# Altium PCB 4.2inchbarcode1.PcbDoc
Units mm, origin at the board's own origin, x right, y up, seen from the top; angles counter-clockwise.
Board outline 113.92 x 82.94 mm, 2 copper layers (Top Layer, Bottom Layer), stack 1.57 mm thick; 91 components, 63 nets, 333 pads, 120 vias.
Unrouted connection lines stored in the file: 50.
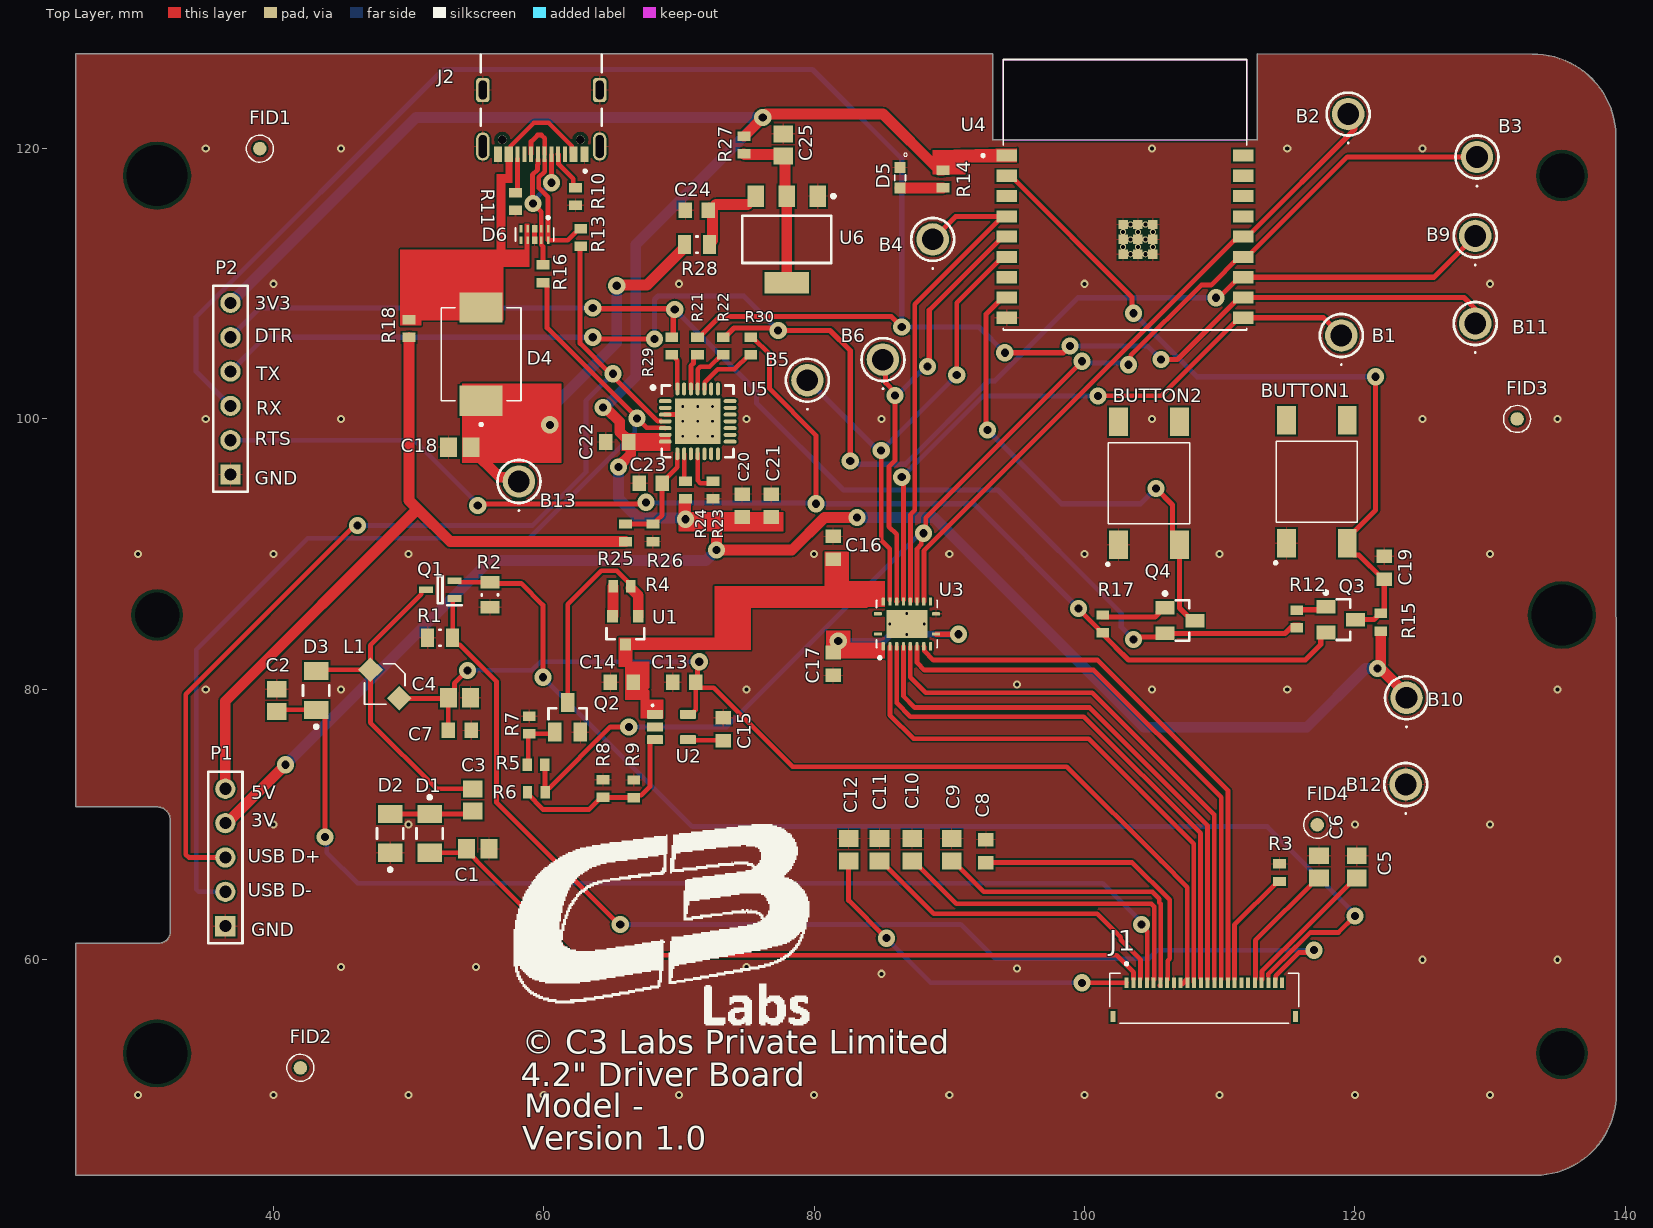
[diagram p0: Top Layer view]
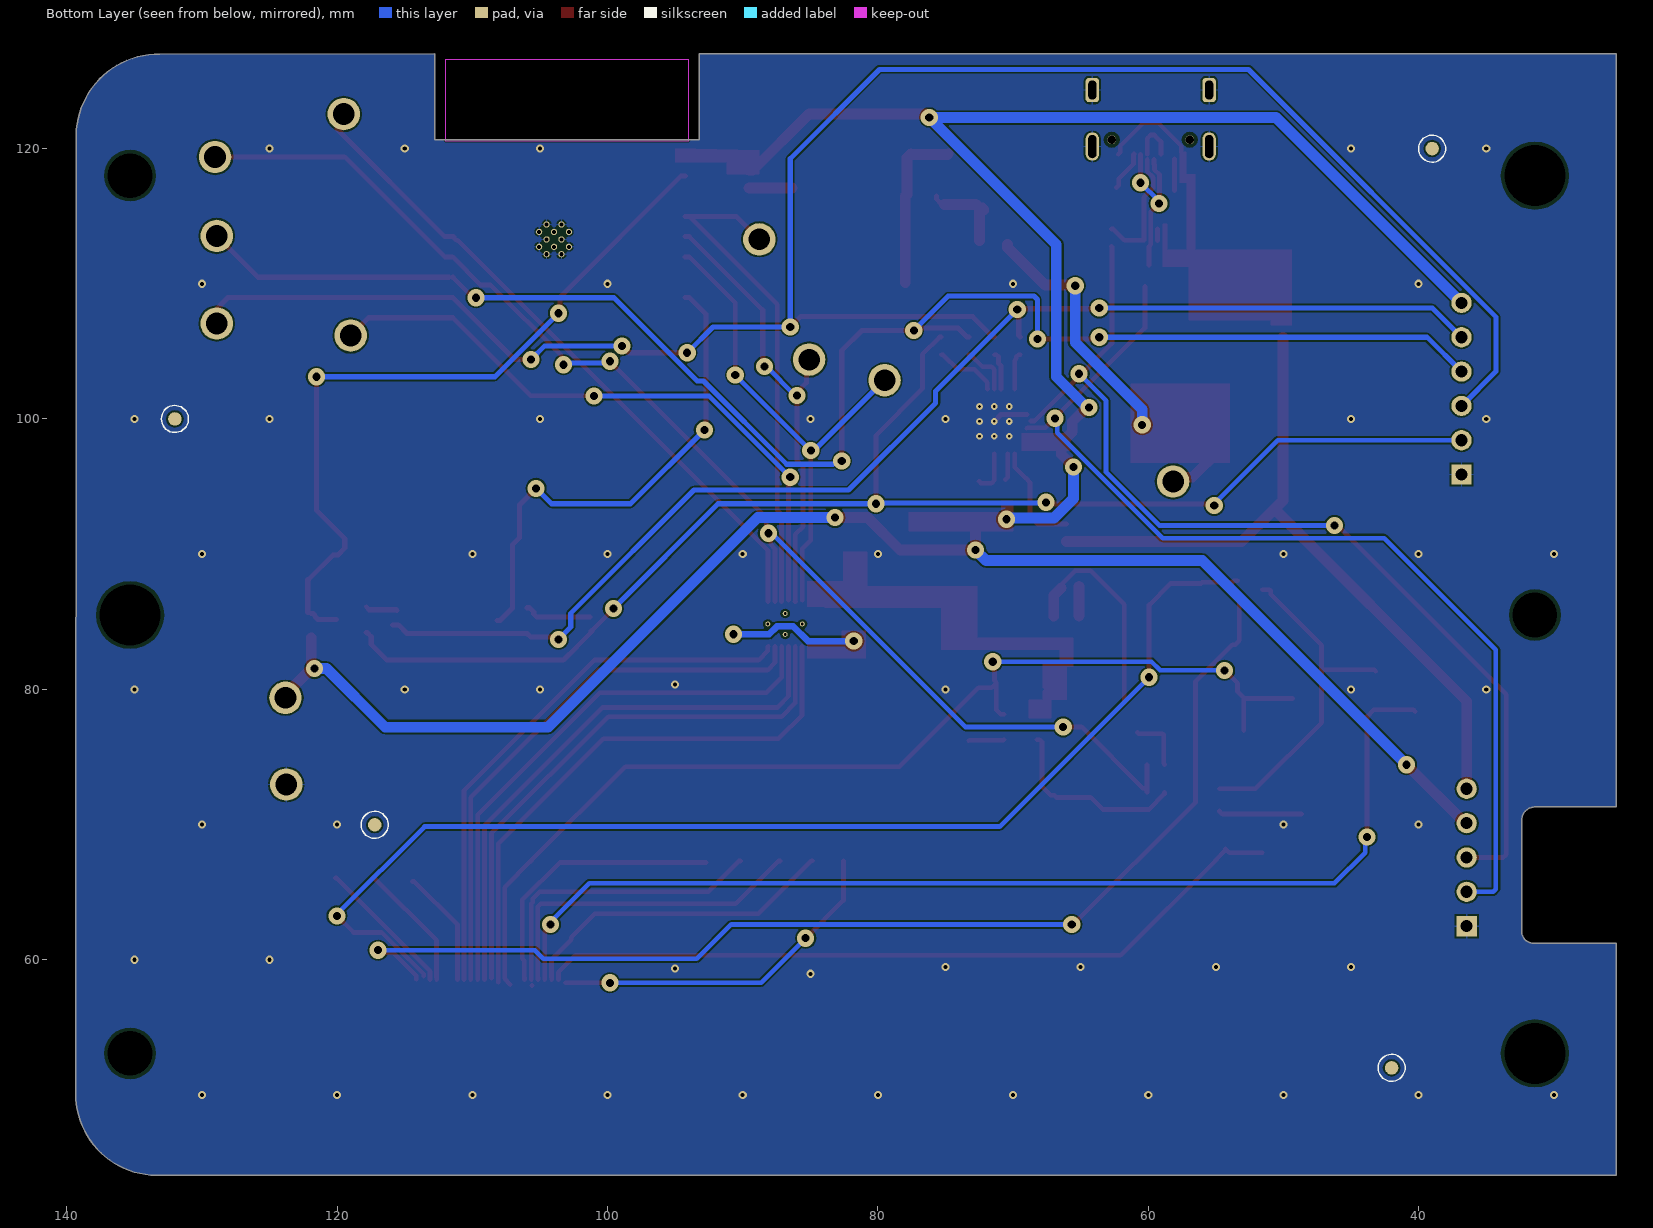
[diagram p1: Bottom Layer view, seen from below]
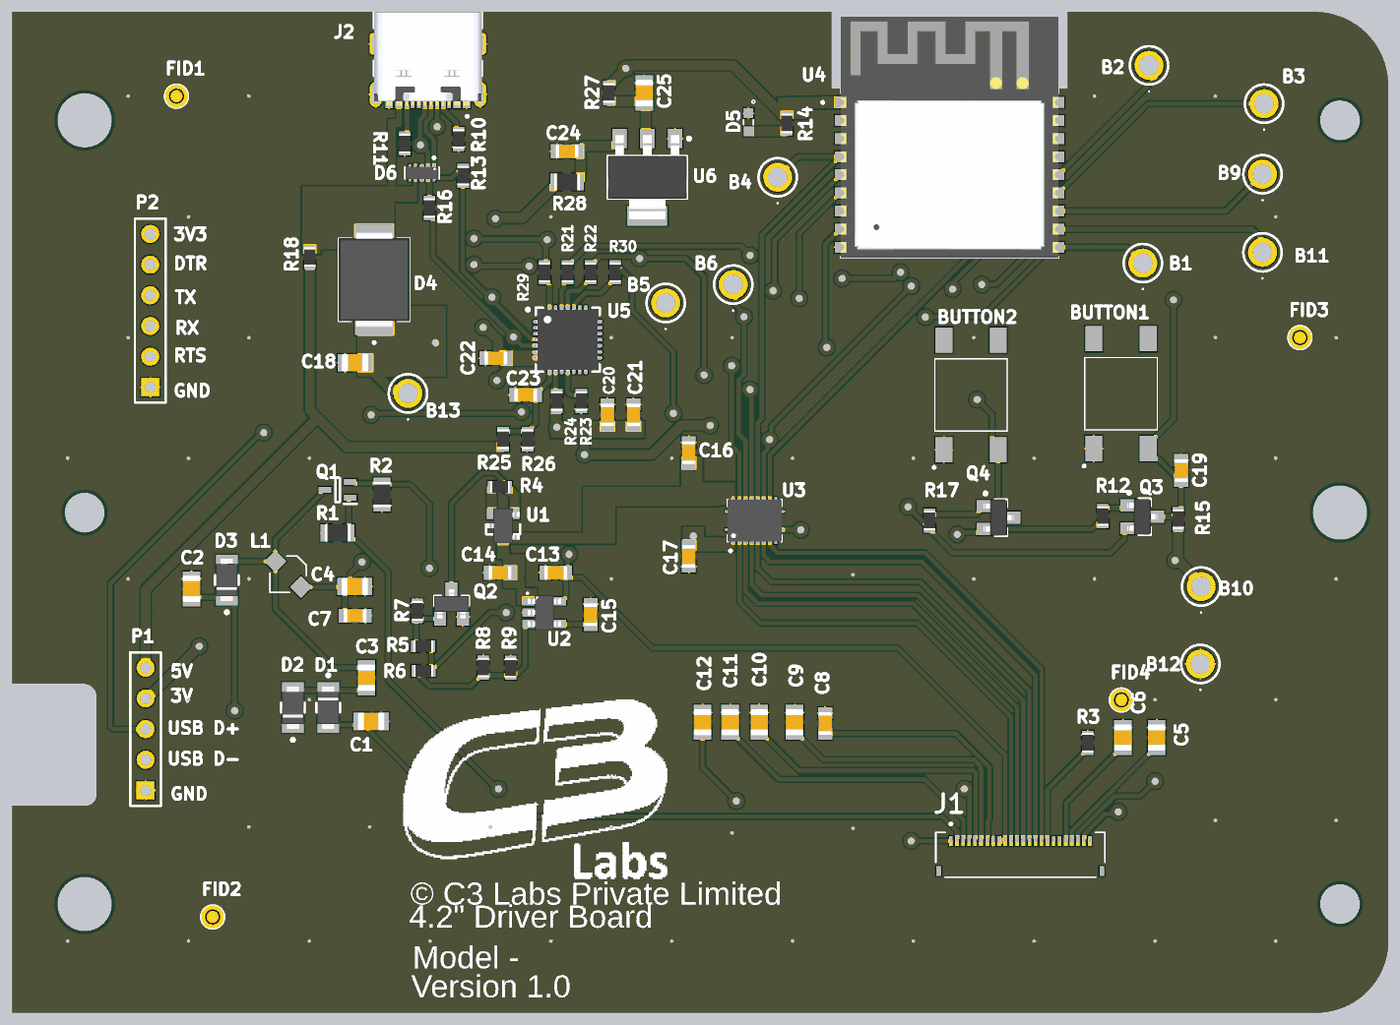
[diagram p2: 3D render of the assembled board from above, using the file's embedded part models]

## Layer stack, top to bottom
Top Solder: solder mask 0.0127, Solder Resist, Dk 3.8
Top Layer: signal copper 0.035
Dielectric: core 1.5, FR-4, Dk 4.5
Bottom Layer: signal copper 0.035
Bottom Solder: solder mask 0.0127, Solder Resist, Dk 3.8

## Board outline
25.4,44.069 25.4,61.087 25.4,61.214 31.496,61.214 ccw(c31.496,62.103) 32.385,62.103 32.385,70.294 ccw(c31.369,70.294) 31.369,71.31 25.4,71.31 25.4,127 93.218,127 93.218,120.65 112.776,120.65 112.776,127 133.118,126.981 cw(c133.218,120.898) 139.302,120.998 139.302,120.997 139.319,49.706 cw(c133.33,50.058) 132.977,44.069

## Design rules (kind name [scope] priority, off if disabled: settings)
BoardOutlineClearance [InNet('No Net') And OnLayer('Top Layer')] p1: gap=0.2 ignorepadtopadclearanceinfootprint=FALSE
Clearance [All] p1: gap=0.127 ignorepadtopadclearanceinfootprint=TRUE except(0.25: Arc-Hole Track-Hole SMDPad-Hole THPad-Hole Via-Hole Fill-Hole Poly-Hole Region-Hole Text-Hole)
ComponentClearance [All] p1: gap=0.127 collisioncheckmode=3 verticalgap=0.127 showdistances=TRUE
DiffPairsRouting [All] p1: maxlimit=0.254 minlimit=0.127 mostfreqgap=0.127 toplayer_minwidth=0.127 toplayer_maxwidth=25.4 toplayer_prefwidth=0.127 bottomlayer_minwidth=0.127 bottomlayer_maxwidth=25.4 bottomlayer_prefwidth=0.127 maxuncoupledlength=12.7
Height [All] p1: minheight=0 maxheight=1816.048 prefheight=12.7
HoleSize [IsVia] p1: absolutevalues=TRUE maxlimit=6.3 minlimit=0.2 maxpercent=80.000 minpercent=20.000
HoleToHoleClearance [All] p1: gap=0.25 allowstackedmicrovias=FALSE
MinimumAnnularRing [All] p1: minimumring=0.076
MinimumSolderMaskSliver [All] p1: minsoldermaskwidth=0
PlaneClearance [All] p1: clearance=0.127
PlaneConnect PlaneConnectPowerPads [InPadClass('PowerPads')] p1: planeconnectstyle=Direct reliefexpansion=0.508 reliefentries=4 reliefconductorwidth=0.254 reliefairgap=0.254
PlaneConnect [All] p2: pad.planeconnectstyle=Relief pad.reliefexpansion=0.3 pad.reliefentries=4 pad.reliefconductorwidth=0.127 pad.reliefairgap=0.127 via.planeconnectstyle=Direct via.reliefexpansion=0.3 via.reliefentries=4 via.reliefconductorwidth=0.127 via.reliefairgap=0.127
PolygonConnect PolygonConnectPowerPads [All vs (InPadClass('PowerPads'))] p1: connectstyle=Direct reliefconductorwidth=0.254 reliefentries=4 polygonreliefangle="90 Angle" airgapwidth=0.254
PolygonConnect [All] p2: thpad.connectstyle=Relief thpad.reliefconductorwidth=0.127 thpad.reliefentries=4 thpad.polygonreliefangle="90 Angle" thpad.airgapwidth=0.127 smdpad.connectstyle=Relief smdpad.reliefconductorwidth=0.127 smdpad.reliefentries=4 smdpad.polygonreliefangle="90 Angle" smdpad.airgapwidth=0.127 via.connectstyle=Direct via.reliefconductorwidth=0.127 via.reliefentries=4 via.polygonreliefangle="90 Angle" via.airgapwidth=0.127
RoutingVias [All] p1: holewidth=0.3 width=0.6 viastyle="Through Hole" minholewidth=0.3 minwidth=0.6 maxholewidth=0.6 maxwidth=6.6
SilkToSilkClearance [All] p1: silktosilkclearance=0
SilkToSolderMaskClearance [IsText] p1: minsilkscreentomaskgap=0.127 clearancetoexposedcopper=TRUE
SolderMaskExpansion [All] p1: expansion=0.075 istentingtop=FALSE
Width [All] p1: maxlimit=25.4 minlimit=0.127 preferedwidth=0.127 minimp=50.000000 maximp=50.000000 favimp=50.000000
20 further rules are at their usual default settings.

## Classes and differential pairs
component class microcontroller_board2: B9 B10 B11 B12 B13 BUTTON1 BUTTON2 C18 C19 C20 C21 C22 C23 C24 C25 D4 D5 D6 J2 P1 P2 Q3 Q4 R10 R11 R12 R13 R14 R15 R16 R17 R18 R21 R22 R23 R24 R25 R26 R27 R28 R29 R30 U4 U5 U6
component class 4.2inchdisplay1: B1 B2 B3 B4 B5 B6 C1 C2 C3 C4 C5 C6 C7 C8 C9 C10 C11 C12 C13 C14 C15 C16 C17 D1 D2 D3 L1 Q1 Q2 R1 R2 R3 R4 R5 R6 R7 R8 R9 U1 U2 U3

## Components (designator, comment, footprint, x,y, rotation, side; value= is the part's Value field where it differs from the comment)
B1 "5010" 5010 118.999,106.172 r0 top
B2 "5010" 5010 119.507,122.555 r0 top
B3 "5010" 5010 129.032,119.38 r0 top
B4 "5010" 5010 88.773,113.284 r0 top
B5 "5010" 5010 79.502,102.87 r0 top
B6 "5010" 5010 85.09,104.394 r0 top
B9 "5010" 5010 128.905,113.538 r0 top
B10 "5010" 5010 123.825,79.375 r0 top
B11 "5010" 5010 128.905,107.061 r0 top
B12 "5010" 5010 123.761,72.962 r0 top
B13 "5010" 5010 58.166,95.377 r0 top
BUTTON1 "TL3301AF160QG" TL3301AF160QG 117.185,95.355 r0 top
BUTTON2 "TL3301AF160QG" TL3301AF160QG 104.775,95.25 r0 top
C1 "4.7uF/25V" Cap_0805 55.118,68.199 r0 top
C2 "4.7uF/25V" Cap_0805 40.244,79.184 r90 top
C3 "4.7uF/25V" Cap_0805 54.737,71.819 r270 top
C4 "4.7uF/25V" Cap_0805 53.769,79.375 r0 top
C5 "4.7uF/25V" Cap_0805 120.142,66.865 r270 top
C6 "4.7uF/25V" Cap_0805 117.348,66.865 r270 top
C7 "100nF/50v" Cap_0603 53.794,76.962 r180 top
C8 "1uF/50v" Cap_0603 92.71,68.034 r270 top
C9 "4.7uF/25V" Cap_0805 90.17,68.136 r270 top
C10 "4.7uF/25V" Cap_0805 87.249,68.136 r270 top
C11 "4.7uF/25V" Cap_0805 84.836,68.137 r270 top
C12 "1uF/25V" Cap_0805 82.55,68.136 r270 top
C13 "1uF" Cap_0603 70.397,80.518 r180 top
C14 "1uF" Cap_0603 65.786,80.518 r180 top
C15 "22nF" Cap_0603 73.279,77.05 r90 top
C16 "0.1uF" Cap_0603 81.407,90.463 r90 top
C17 "0.1uF" Cap_0603 81.407,81.876 r90 top
C18 "22uF" Cap_0805 53.784,97.917 r0 top
C19 "1uF/16V" Cap_0603 122.174,88.988 r90 top
C20 "10uF/25V" Cap_0603 74.676,93.599 r90 top
C21 "0.1uF/50V" Cap_0603 76.835,93.599 r90 top
C22 "10uF/25V" Cap_0603 65.444,98.298 r180 top
C23 "1uF/16V" Cap_0603 67.906,95.25 r180 top
C24 "10uF/16V" Cap_0603 71.335,115.443 r0 top
C25 "100uF/6.3V" Cap_0805 77.724,120.269 r270 top
D1 "" ON_Semi_SOD-123F_0 51.562,69.342 r270 top
D2 "" ON_Semi_SOD-123F_0 48.641,69.342 r90 top
D3 "" ON_Semi_SOD-123F_0 43.165,79.916 r90 top
D4 "SS34" DIOM7959X265N 55.372,104.79 r90 top
D5 "LTST-C190KRKT" LEDM1608X80 86.36,117.844 r270 top
D6 "TPD4E02B04DQAR" DIO_TPD4E02B04DQAR 59.325,113.644 r270 top
FID1 "Comment" FIDUCIAL1SM2 39,120 r0 top
FID2 "Comment" FIDUCIAL1SM2 42,52 r0 top
FID3 "Comment" FIDUCIAL1SM2 132,100 r0 top
FID4 "Comment" FIDUCIAL1SM2 117.221,69.977 r0 top
J1 "AYF532435" PANASONIC_AYF532435 108.86,57.15 r0 top
J2 "USB4105-GF-A" GCT_USB4105-GF-A 59.817,124.333 r180 top
L1 "CDRH2D18/LDNP-470NC" IND_CDRH2D18/HPNP-1R1NC 48.245,80.391 r0 top
P1 "Header 5" HDR1X5 36.449,62.484 r90 top
P2 "Header 6" HDR1X6 36.83,95.885 r90 top
Q1 "SI1308EDL-T1-GE3" SOT65P210X110-3N 52.339,87.376 r180 top
Q2 "MMS8050-H-TP" SOT23-BEC 61.768,77.935 r0 top
Q3 "KSC3265YMTF" KSC3265YMTF 118.956,85.156 r0 top
Q4 "KSC3265YMTF" KSC3265YMTF 107.061,85.09 r0 top
R1 "10k/NC" RES_0805 52.339,83.82 r180 top
R2 "2.2ohm" RES_0805 56.022,86.995 r270 top
R3 "0" RES_0603 114.427,66.436 r270 top
R4 "100k" RES_0603 65.786,87.63 r180 top
R5 "1k" RES_0603 59.436,74.422 r180 top
R6 "1k" RES_0603 59.451,72.39 r0 top
R7 "47k" RES_0603 58.928,77.358 r270 top
R8 "47k" RES_0603 64.389,72.659 r90 top
R9 "100K" RES_0603 66.66,72.644 r270 top
R10 "4.7K" RES_0603 62.357,116.459 r90 top
R11 "4.7K" RES_0603 57.912,116.078 r90 top
R12 "10k" RES_0603 115.697,85.217 r90 top
R13 "0" RES_0603 62.738,113.411 r90 top
R14 "50" RES_0603 89.535,117.744 r90 top
R15 "10k" RES_0603 121.92,84.963 r270 top
R16 "0" RES_0603 59.944,110.744 r90 top
R17 "10k" RES_0603 101.346,84.851 r90 top
R18 "0" RES_0603 50.038,106.68 r90 top
R21 "0" RES_0603 71.374,105.41 r90 top
R22 "0" RES_0603 73.279,105.41 r90 top
R23 "10k" RES_0603 72.517,94.742 r270 top
R24 "1k" RES_0603 70.485,94.742 r270 top
R25 "22K" RES_0603 66.04,91.582 r270 top
R26 "47.5K" RES_0603 68.072,91.582 r270 top
R27 "0" RES_0603 74.803,120.269 r90 top
R28 "0R" RES_0805 71.338,112.903 r0 top
R29 "0" RES_0603 69.469,105.41 r90 top
R30 "0" RES_0603 75.311,105.41 r90 top
U1 "SI2301CDS-T1-E3" SOT23-3 66.04,84.412 r180 top
U2 "RT9193-33GB" SOT94P279X129-5N 69.454,77.216 r0 top
U3 "TXS0108ERGYR" IC_TXS0108ERGYR 86.863,84.836 r90 top
U4 "ESP32-C3-WROOM-02-N4" MODULE_ESP32-C3-WROOM-02-H4 102.997,116.586 r0 top
U5 "CP2102N-A02-GQFN28" CP2102N-A02-GQFN28 71.387,99.822 r0 top
U6 "ZLDO1117QG33TA" ZLDO1117QG33TA 77.978,113.284 r270 top

## Footprints (in the part's own frame and the unit in brackets; to place one, negate y for a bottom-side part, rotate by r counter-clockwise, add the part's x,y. Pads: shape width x height; smd on the part's side, far side on the other; paste and mask are expansions set on the pad)
5010 [mm]
  round 2.4 hole 1.6: 1(0,0)
  silkscreen extent -1.59,-2.2 1.59,1.59
Cap_0603 [mm] "Chip Capacitor, 2-Leads, Body 1.80x1.00mm, IPC Medium Density"
  rect 1x1.15 smd: 1(-0.85,0) 2(0.85,0)
  body extent -0.95,-0.55 0.95,0.55, height 0.8
Cap_0805 [mm] "Chip Capacitor, 2-Leads, Body 2.00x1.25mm, IPC Medium Density"
  rect 1.25x1.45 smd: 1(-0.825,0) 2(0.825,0)
  body extent -1.1,-0.72 1.1,0.72, height 1.45
CP2102N-A02-GQFN28 [mm] "QFN, 28-Leads, Body 5.00x5.00mm, Pitch 0.50mm, Thermal Pad 3.35x3.35mm, IPC Medium Density"
  oval 0.95x0.3 smd: 1(-2.4,1.5) 2(-2.4,1) 3(-2.4,0.5) 4(-2.4,0) 5(-2.4,-0.5) 6(-2.4,-1) 7(-2.4,-1.5) 15(2.4,-1.5) 16(2.4,-1) 17(2.4,-0.5) 18(2.4,0) 19(2.4,0.5) 20(2.4,1) 21(2.4,1.5)
  oval 0.3x0.95 smd: 8(-1.5,-2.4) 9(-1,-2.4) 10(-0.5,-2.4) 11(0,-2.4) 12(0.5,-2.4) 13(1,-2.4) 14(1.5,-2.4) 22(1.5,2.4) 23(1,2.4) 24(0.5,2.4) 25(0,2.4) 26(-0.5,2.4) 27(-1,2.4) 28(-1.5,2.4)
  rect 3.35x3.35 smd: 29(0,0)
  silkscreen extent -3.42,-2.65 2.65,2.65, body extent -2.55,-2.55 2.55,2.55, height 0.8
DIO_TPD4E02B04DQAR [mm]
  rect 0.565x0.2 smd mask+0: 1(-0.417,1) 2(-0.417,0.5) 4(-0.417,-0.5) 5(-0.417,-1) 6(0.417,-1) 7(0.417,-0.5) 9(0.417,0.5) 10(0.417,1)
  rect 0.565x0.4 smd paste-1 mask+0: 3(-0.417,0) 8(0.417,0)
  silkscreen extent -1.35,-1.42 0.5,1.42, body extent -0.5,-1.25 0.5,1.25, height 0.55
DIOM7959X265N [mm]
  rect 2.25x3.18 smd: A(3.455,0) C(-3.455,0)
  silkscreen extent -5.3,-2.95 3.44,2.95, body extent -3.98,-2.95 3.98,2.95, height 2.65
FIDUCIAL1SM2 [mm] "FIDUCIAL 1mm Pad, 2mm SolderMask"
  round 1 smd paste-1.016 mask+0.5: ""(0,0)
  round 1 smd far side mask+0.5: ""(0,0)
  silkscreen extent -1,-1 1,1
GCT_USB4105-GF-A [mm]
  rect 0.6x1.15 smd: A1_B12(-3.2,4.755) A4_B9(-2.4,4.755) B1_A12(3.2,4.755) B4_A9(2.4,4.755)
  rect 0.3x1.15 smd: A5(-1.25,4.755) A6(-0.25,4.755) A7(0.25,4.755) A8(1.25,4.755) B5(1.75,4.755) B6(0.75,4.755) B7(-0.75,4.755) B8(-1.75,4.755)
  oval 1x2.1 hole 0.6 slot 1.7 at 90 deg: SH1(-4.32,4.18) SH2(4.32,4.18)
  rrect50% 1x1.8 hole 0.6 slot 1.4 at 90 deg: SH3(-4.32,0) SH4(4.32,0)
  round 0.65 hole 0.65 unplated: ""(-2.89,3.68) ""(2.89,3.68)
  silkscreen extent -4.47,-2.6 4.47,6.1, body extent -4.47,-2.6 4.47,5.11, height 3.31
HDR1X5 [mm] "Connector; Header; 5 Position"
  rect 1.5x1.5 hole 0.9: 1(0,0)
  round 1.5 hole 0.9: 2(2.54,0) 3(5.08,0) 4(7.62,0) 5(10.16,0)
  silkscreen extent -1.27,-1.27 11.43,1.27
HDR1X6 [mm] "Connector; Header; 6 Position"
  rect 1.5x1.5 hole 0.9: 1(0,0)
  round 1.5 hole 0.9: 2(2.54,0) 3(5.08,0) 4(7.62,0) 5(10.16,0) 6(12.7,0)
  silkscreen extent -1.27,-1.27 13.97,1.27
IC_TXS0108ERGYR [mm]
  rrect40% 0.24x0.6 smd: 1(-0.75,2.15) 10(-0.75,-2.15) 11(0.75,-2.15) 20(0.75,2.15)
  rrect40% 0.6x0.24 smd: 2(-1.65,1.75) 3(-1.65,1.25) 4(-1.65,0.75) 5(-1.65,0.25) 6(-1.65,-0.25) 7(-1.65,-0.75) 8(-1.65,-1.25) 9(-1.65,-1.75) 12(1.65,-1.75) 13(1.65,-1.25) 14(1.65,-0.75) 15(1.65,-0.25) 16(1.65,0.25) 17(1.65,0.75) 18(1.65,1.25) 19(1.65,1.75)
  rect 2.05x3.05 smd paste-3: 21(0,0)
  round 0.36 hole 0.2 mask+0: 22(0,1.275) 23(-0.775,0) 24(0.775,0) 25(0,-1.275)
  silkscreen extent -2.6,-2.25 1.75,2.25, body extent -1.75,-2.25 1.75,2.25, height 1
IND_CDRH2D18/HPNP-1R1NC [mm]
  rect 1.3x1.3 smd rot 135: 1(-1.061,1.061) 2(1.061,-1.061)
  silkscreen extent -1.5,-1.5 1.5,1.5
KSC3265YMTF [mm] "SOT23, 3-Leads, Body 2.90x2.40mm, Pitch 0.95mm, IPC Medium Density"
  rect 1.4x1 smd: 1(-1.1,0.95) 2(-1.1,-0.95) 3(1.1,0)
  silkscreen extent -1.22,-1.5 0.7,2.12, body extent -1.25,-1.5 1.25,1.5, height 1.14
LEDM1608X80 [mm]
  rect 0.8x0.8 smd: A(0.75,0) C(-0.75,0)
  silkscreen extent -1.83,-0.4 0.2,0.53
MODULE_ESP32-C3-WROOM-02-H4 [mm]
  rect 1.5x0.9 smd: 1(-8.75,2.9) 2(-8.75,1.4) 3(-8.75,-0.1) 4(-8.75,-1.6) 5(-8.75,-3.1) 6(-8.75,-4.6) 7(-8.75,-6.1) 8(-8.75,-7.6) 9(-8.75,-9.1) 10(8.75,-9.1) 11(8.75,-7.6) 12(8.75,-6.1) 13(8.75,-4.6) 14(8.75,-3.1) 15(8.75,-1.6) 16(8.75,-0.1) 17(8.75,1.4) 18(8.75,2.9)
  rect 0.7x0.7 smd: 19(-0.14,-2.2) 20(0.96,-2.2) 21(2.06,-2.2) 22(-0.14,-3.3) 23(0.96,-3.3) 24(2.06,-3.3) 25(-0.14,-4.4) 26(0.96,-4.4) 27(2.06,-4.4)
  round 0.46 hole 0.3 mask+0: 28(0.41,-2.2) 29(1.51,-2.2) 30(-0.14,-2.75) 31(0.96,-2.75) 32(2.06,-2.75) 33(0.41,-3.3) 34(1.51,-3.3) 35(-0.14,-3.85) 36(0.96,-3.85) 37(2.06,-3.85) 38(0.41,-4.4) 39(1.51,-4.4)
  Keep-Out Layer region: 9,4 -9,4 -9,10 9,10
  Keep-Out Layer region: 9,4 -9,4 -9,10 9,10
  silkscreen extent -10.6,-10 9,10, body extent -9,-10 9,10, height 3.35
ON_Semi_SOD-123F_0 [mm] "SOD-123F"
  rect 1.34x1.8 smd paste+0 mask+0: 1(-1.43,0) 2(1.43,0)
  silkscreen extent -2.8,-0.97 0.39,0.97, body extent -2.2,-1.07 2.2,1.07, height 0.25
PANASONIC_AYF532435 [mm]
  rect 0.3x0.8 smd paste-1: 1(-5.75,1.15) 2(-5.25,1.15) 3(-4.75,1.15) 4(-4.25,1.15) 5(-3.75,1.15) 6(-3.25,1.15) 7(-2.75,1.15) 8(-2.25,1.15) 9(-1.75,1.15) 10(-1.25,1.15) 11(-0.75,1.15) 12(-0.25,1.15) 13(0.25,1.15) 14(0.75,1.15) 15(1.25,1.15) 16(1.75,1.15) 17(2.25,1.15) 18(2.75,1.15) 19(3.25,1.15) 20(3.75,1.15) 21(4.25,1.15) 22(4.75,1.15) 23(5.25,1.15) 24(5.75,1.15)
  rect 0.4x0.8 smd: S1(-6.75,-1.35) S2(6.75,-1.35)
  silkscreen extent -7,-1.85 7,2.65
RES_0603 [mm]
  rect 0.7x0.95 smd: 1(-0.65,0) 2(0.65,0)
  body extent -0.8,-0.48 0.8,0.48, height 0.45
RES_0805 [mm]
  rect 0.95x1.4 smd: 1(-0.925,0) 2(0.925,0)
  silkscreen extent -0.05,-0.6 0.05,0.6, body extent -1.05,-0.7 1.05,0.7, height 0.45
SOT23-3 [mm]
  rect 0.8x0.9 smd: 1(-0.95,-1) 2(0.95,-1) 3(0,1.1)
  silkscreen extent -1.4,-0.1 1.4,0.7, body extent -1.4,-1.45 1.4,1.45, height 1.25
SOT23-BEC [mm]
  rect 1x1.4 smd: B(-0.95,-1.1) C(0,1.1) E(0.95,-1.1)
  silkscreen extent -1.42,-0.15 1.42,0.66, body extent -1.45,-1.2 1.45,1.2, height 1.11
SOT65P210X110-3N [mm]
  rect 1.05x0.5 smd: 1(-1.05,0.65) 2(-1.05,-0.65) 3(1.05,0)
  silkscreen extent -1.58,-1 0.18,1.15
SOT94P279X129-5N [mm]
  rrect12% 1.17x0.67 smd: 1(-1.22,0.94) 2(-1.22,0) 3(-1.22,-0.94) 4(1.22,-0.94) 5(1.22,0.94)
  silkscreen extent -1.47,1.53 -1.33,1.67, body extent -1.4,-1.45 1.4,1.45, height 1.3
TL3301AF160QG [mm]
  rect 1.4x2.1 smd: 1(-2.25,-4.55) 2(-2.25,4.55) 3(2.25,-4.55) 4(2.25,4.55)
  silkscreen extent -3.1,-6.05 3,3
ZLDO1117QG33TA [mm] "SOT223, 4-Leads, Body 6.50x7.00mm (avg), Pitch 2.30mm, IPC Medium Density"
  rect 1.6x1.2 smd: 1(-3.2,2.3) 2(-3.2,0) 3(-3.2,-2.3)
  rect 1.6x3.3 smd: 4(3.2,0)
  silkscreen extent -3.32,-3.3 1.75,3.58, body extent -3.5,-3.27 3.5,3.27, height 1.66

## Part data
B1 B2 B3 B4 B5 B6 B9 B10 B11 B12 B13: "KEYSTONE - 5010 - TEST POINT, PCB, THROUGH HOLE", Manufacturer_Name="Keystone Electronics", Mouser Part Number=534-5010, Arrow Part Number=5010, Arrow Price/Stock=https://www.arrow.com/en/products/5010/keystone-electronics?region=europe, Datasheet Link=http://www.farnell.com/datasheets/1703983.pdf, Geometry.Height=8.28mm, Manufacturer_Part_Number=5010, Mouser Price/Stock=https://www.mouser.co.uk/ProductDetail/Keystone-Electronics/5010?qs=qOqV1E1P08SzD%252BWfk1wMXQ%3D%3D, MP=5010
BUTTON1 BUTTON2: library part CON4AP_0, MP=TL3301AF160QG
C1 C2 C3 C4 C5 C6: library part CAP_0805, MP=KAM15AR71H104KM, Package Size=CAP_0805
C7: library part CAP_0603, "KAM15AR71H104KM", MP=KAM15AR71H104KM, Package Size=CAP_0603
C8: library part CAP_0603, "UMK107AB7105KA-T", MP=UMK107AB7105KA-T, Package Size=CAP_0603
C9 C10 C11: library part CAP_0805, "TMK212AB7475KG-T", MP=TMK212AB7475KG-T, Package Size=CAP_0805
C12: library part CAP_0805, "MCAST21GSB7105MTNB25", MP=MCAST21GSB7105MTNB25, Package Size=CAP_0805
C13 C14: library part CAP_0603, "GRT188R61H105KE13D", MP=GRT188R61H105KE13D, Package Size=CAP_0603
C15: library part CAP_0603, "GCM188R71H223KA37J", MP=GCM188R71H223KA37J, Package Size=CAP_0603
C16: library part CAP_0603, MP=GCM188R71H104KA57J, Package Size=CAP_0603
C17: library part CAP_0603, "GCM188R71H104KA57J", MP=GCM188R71H104KA57J, Package Size=CAP_0603
C18: library part CAP_0805, "810-C2012X5R1V226MAC", MP=C2012X5R1V226M125AC, Package Size=CAP_0805
C19: library part "CAP NP_Dup2", Manufacturer=Murata, Part Name=NC_GRM155R71H104KE14D, Part Number=NC_0102-1422C12, Tolerance=¡Ó10%, Voltage=16V, 0 LOAD CHECK 0=¡´, Characteristics=X7R, Distributor=¹ñ´I, Distributor1=·ç±¶, Distributor2=¬ü©_, EIAJ=C0402, GeometryHeight=0.55mm, Material Description=NC_CAP,ML,0.1uF,X7R,50V,0402,K%,MU,RoHS, MP=GRT188R71C105KE13D, Part Type=Capacitor, PCB Footprint=C0603
C20: library part "CAP NP_Dup2", Manufacturer=Murata, Part Name=GRM188R61E106MA73J, Part Number=NC_0102-1422C12, Tolerance=¡Ó10%, Voltage=25V, 0 LOAD CHECK 0=¡´, Characteristics=X7R, Distributor=¹ñ´I, Distributor1=·ç±¶, Distributor2=¬ü©_, EIAJ=C0402, GeometryHeight=0.55mm, Material Description=NC_CAP,ML,0.1uF,X7R,50V,0402,K%,MU,RoHS, MP=GRM188R61E106MA73J, Part Type=Capacitor, PCB Footprint=C0603
C21: library part "CAP NP_Dup2", Manufacturer=Murata, Part Name=NC_GRM155R71H104KE14D, Part Number=NC_0102-1422C12, Tolerance=¡Ó10%, Voltage=50V, 0 LOAD CHECK 0=¡´, Characteristics=X7R, Distributor=¹ñ´I, Distributor1=·ç±¶, Distributor2=¬ü©_, EIAJ=C0402, GeometryHeight=0.55mm, Material Description=NC_CAP,ML,0.1uF,X7R,50V,0402,K%,MU,RoHS, MP=GCM188R71H104KA57J, Part Type=Capacitor, PCB Footprint=C0603
C22: library part "CAP NP_Dup2", "GRM188R61E106MA73J", Manufacturer=Murata, Part Name=NC_GRM155R71H104KE14D, Part Number=NC_0102-1422C12, Tolerance=¡Ó10%, Voltage=16V, 0 LOAD CHECK 0=¡´, Characteristics=X7R, Distributor=¹ñ´I, Distributor1=·ç±¶, Distributor2=¬ü©_, EIAJ=C0402, GeometryHeight=0.55mm, Material Description=NC_CAP,ML,0.1uF,X7R,50V,0402,K%,MU,RoHS, MP=GRM188R61E106MA73J, Part Type=Capacitor, PCB Footprint=C0603
C23: library part "CAP NP_Dup2", "GRT188R71C105KE13D", Manufacturer=Murata, Part Name=NC_GRM155R71H104KE14D, Part Number=NC_0102-1422C12, Tolerance=¡Ó10%, Voltage=16V, 0 LOAD CHECK 0=¡´, Characteristics=X7R, Distributor=¹ñ´I, Distributor1=·ç±¶, Distributor2=¬ü©_, EIAJ=C0402, GeometryHeight=0.55mm, Material Description=NC_CAP,ML,0.1uF,X7R,50V,0402,K%,MU,RoHS, MP=GRT188R71C105KE13D, Part Type=Capacitor, PCB Footprint=C0603
C24: library part CAP_0603, "C54", MP=GRM188R61C106MAALD, Package Size=CAP_0603
C25: library part CAP_0805, "GRM21BR60J107ME15K", MP=GRM21BR60J107ME15K, Package Size=CAP_0805
D1 D2 D3: library part "Schottky Diode", "Schottky Barrier Rectifier, 40 V Maximum DC Blocking Voltage, -65 to 125 degC, 2-Pin SMA Case, RoHS", ComponentLink1Description="Manufacturer URL", ComponentLink1URL=http://www.vishay.com/, ComponentLink2Description=Datasheet, ComponentLink2URL=http://www.vishay.com/docs/88746/ss12.pdf, ComponentLink3Description="Package Specification", ComponentLink3URL=http://www.vishay.com/docs/88746/ss12.pdf, MF=CDRH2D18/LDNP-470NC, MP=CDRH2D18/LDNP-470NC
D4: "Diode Schottky 40 V 3A Surface Mount SMC (DO-214AB)", Package="SMC-2 ON Semiconductor", Check_prices=https://www.snapeda.com/parts/SS34/Onsemi/view-part/?ref=eda, MF=onsemi, MP=SS34, SnapEDA_Link=https://www.snapeda.com/parts/SS34/Onsemi/view-part/?ref=snap
D5: library part HSMS-C190, "Red 626nm LED Indication - Discrete 2.1V 0603 _1608 Metric_", Package="0603 Broadcom", Availability=Unavailable, MF="Broadcom Limited", MP=LTST-C190KRKT, Price=None, SnapEDA_Link=https://www.snapeda.com/parts/HSMS-C190/Broadcom%20Limited/view-part/1781258/?ref=snap
D6: "4-channel ESD protection diode for USB Type-C and HDMI 2.0 10-USON -40 to 125", Package="USON-10 Texas Instruments", Check_prices=https://www.snapeda.com/parts/TPD4E02B04DQAR/Texas%20Instruments/view-part/576424/?ref=eda, Digi-Key_Part_Number=296-43875-1-ND, MF="Texas Instruments", MP=TPD4E02B04DQAR, Purchase-URL=https://pricing.snapeda.com/search/part/TPD4E02B04DQAR/?ref=eda, SnapEDA_Link=https://www.snapeda.com/parts/TPD4E02B04DQAR/Texas%20Instruments/view-part/576424/?ref=snap
J1: "24 Position FFC, FPC Connector Contacts, Top and Bottom 0.020 (0.50mm) Surface Mount, Right Angle", Package=None, Availability="In Stock", Check_prices=https://www.snapeda.com/parts/AYF532435/Panasonic/view-part/3222527/?ref=eda, MF="Panasonic Electric Works", MP=AYF532435, Price=None, Purchase-URL=https://pricing.snapeda.com/search/part/AYF532435/?ref=eda, SnapEDA_Link=https://www.snapeda.com/parts/AYF532435/Panasonic/view-part/3222527/?ref=snap
J2: "USB-C (USB TYPE-C) USB 2.0 Receptacle Connector 24 (16+8 Dummy) Position Surface Mount, Right Angle; Through Hole", Package=None, Check_prices=https://www.snapeda.com/parts/USB4105-GF-A/Global+Connector+Technology/view-part/?ref=eda, MF=GCT, MP=USB4105-GF-A, SnapEDA_Link=https://www.snapeda.com/parts/USB4105-GF-A/Global+Connector+Technology/view-part/?ref=snap
L1: library part CDRH2D18/HPNP-1R1NC, "Power Inductors - SMD 47uH 0.48A 530ohms", Package=None, Availability=Unavailable, MF=CDRH2D18/LDNP-470NC, MP=CDRH2D18/LDNP-470NC, Price=None
P1: "Header, 5-Pin", LatestRevisionDate=17-Jul-2002, LatestRevisionNote="Re-released for DXP Platform.", Publisher="Altium Limited"
P2: "Header, 6-Pin", LatestRevisionDate=17-Jul-2002, LatestRevisionNote="Re-released for DXP Platform.", Publisher="Altium Limited"
Q1: "N-Channel 30V 1.4A (Tc) 400mW (Ta), 500mW (Tc) Surface Mount SC-70-3", Package="SOT-323 Vishay Semiconductor", Availability="In Stock", Check_prices=https://www.snapeda.com/parts/SI1308EDL-T1-GE3/Vishay%20Siliconix/view-part/5506696/?ref=eda, MF="Vishay Siliconix", MP=SI1308EDL-T1-GE3, Price=None, Purchase-URL=https://pricing.snapeda.com/search/part/SI1308EDL-T1-GE3/?ref=eda, SnapEDA_Link=https://www.snapeda.com/parts/SI1308EDL-T1-GE3/Vishay%20Siliconix/view-part/5506696/?ref=snap
Q2: library part MMBT2222*, "Bipolar (BJT) Transistor NPN 30 V 600 mA 250MHz 300 mW Surface Mount SOT-23-3 (TO-236)", Package="SOT-23-3 Fairchild Semiconductor", Availability="In Stock", Check_prices=https://www.snapeda.com/parts/MMBT2222/Onsemi/view-part/?ref=eda, MF="ON Semiconductor", MP=MMS8050-H-TP, Price=None, SnapEDA_Link=https://www.snapeda.com/parts/MMBT2222/Onsemi/view-part/?ref=snap
Q3 Q4: "Bipolar Transistors - BJT NPN Epitaxial Transistor", MP=KSC3265YMTF
R1: library part RES_0805, "AC0603FR-0710KL", MP=AC0603FR-0710KL, Package Size=RES_0805
R2: library part RES_0805, "CRCW08052R20FKEAHP", MP=CRCW08052R20FKEAHP, Package Size=RES_0805
R3: library part RES_0603, "AC0603FR-070RL", MP=AC0603FR-070RL
R4 R9: library part RES_0603, "AC0603FR-07100KL", MP=AC0603FR-07100KL
R5 R6: library part RES_0603, "AC0603FR-071KL", MP=AC0603FR-071KL
R7: library part RES_0603, "RC0603FR-0747KL", MP=RC0603FR-0747KL
R8 R10 R11 R12 R13 R14 R15 R16 R17 R18 R21 R22 R23 R24 R25 R26 R27 R29 R30: library part RES_0603
  R8: MP=RC0603FR-0747KL
  R13 R16 R18 R27: MP=AC0603FR-070RL
  R14: MP=RT0603BRE0750RL
R28: library part RES_0805, "RC0805JR-070RL", MP=RC0805JR-070RL, Package Size=RES_0805
U1: library part AO3401, "P-Channel 30 V 4A (Ta) 1.4W (Ta) Surface Mount SOT-23-3", Package="TO-236-3 Alpha &amp; Omega Semiconductor Inc.", Check_prices=https://www.snapeda.com/parts/AO3401/Alpha+%2526+Omega+Semiconductor+Inc./view-part/?ref=eda, MF="Alpha &", MP=SI2301CDS-T1-E3, SnapEDA_Link=https://www.snapeda.com/parts/AO3401/Alpha+%2526+Omega+Semiconductor+Inc./view-part/?ref=snap
U2: "Linear Voltage Regulator IC Positive Fixed 1 Output 300mA TSOT-23-5", Package="SOT-23-5 Richtek", Check_prices=https://www.snapeda.com/parts/RT9193-33GB/Richtek+USA+Inc./view-part/?ref=eda, Digi-Key_Part_Number=1028-1014-2-ND, MF="Richtek USA", MP=RT9193-33GB, Purchase-URL=https://pricing.snapeda.com/search/part/RT9193-33GB/?ref=eda, SnapEDA_Link=https://www.snapeda.com/parts/RT9193-33GB/Richtek+USA+Inc./view-part/?ref=snap
U3: "8-bit bidirectional voltage-level shifter for open-drain and push-pull application 20-VQFN -40 to 85", Package="VQFN-20 Texas Instruments", Availability=Unavailable, MF="Texas Instruments", MP=TXS0108ERGYR, Price=None, Purchase-URL=https://pricing.snapeda.com/search/part/TXS0108ERGYR/?ref=eda, SnapEDA_Link=https://www.snapeda.com/parts/TXS0108ERGYR/Texas%20Instruments/view-part/46552/?ref=snap
U4: "WiFi Modules (802.11) (Engineering Samples) SMD module, ESP32-C3, 4MB SPI flash, PCB antenna, -40 C +85 C", Package=Package, Availability="In Stock", Check_prices=https://www.snapeda.com/parts/ESP32-C3-WROOM-02-N4/Espressif+Systems/view-part/?ref=eda, MF="Espressif Systems", MP=ESP32-C3-WROOM-02-N4, Price=None, Purchase-URL=https://pricing.snapeda.com/search/part/ESP32-C3-WROOM-02-N4/?ref=eda, SnapEDA_Link=https://www.snapeda.com/parts/ESP32-C3-WROOM-02-N4/Espressif+Systems/view-part/?ref=snap
U5: "USB Interface IC USBXpress - USB to UART Bridge", MP=CP2102N-A02-GQFN28
U6: "A low dropout, high speed, positive adjustable or fixed-mode (3.3V) / regulator with 1A output current capability.", MP=ZLDO1117QG33TA

## Free pads (board coordinates)
  round 0 hole 4.5 unplated: 10(31.4,53.069) 10(31.4,118) 10(135.319,85.5)
  round 0 hole 3.3 unplated: 10(31.4,85.5) 10(135.319,53.069) 10(135.319,118)

## Via types
v1: diameter 1.27, hole 0.6, Top Layer to Bottom Layer, tented both sides, 57 vias
v2: diameter 0.6, hole 0.3, Top Layer to Bottom Layer, tented both sides, 54 vias
v3: diameter 0.5, hole 0.2, Top Layer to Bottom Layer, 9 vias

## Nets (pads, with @x,y where several pads share a name; then routed paths per layer and width w, separated by ;. In a path a pad name is that pad's centre, name@x,y a point inside that pad or via, vN(x,y) a via of type N, cw(c..) or ccw(c..) an arc to the next point about the centre after c; other vN are vias at no path point)
3V3: C17.2 U3.2 U3.10 | length 11.3
  Top Layer w0.381: U3.10 89.019,84.08 90.672,84.08 v1(90.678,84.074)
  Bottom Layer w0.5: v1(81.788,83.566) 85.167,83.566 86.262,84.661 87.464,84.661 88.051,84.074 v1(90.678,84.074)
GND: B12.1 BUTTON1.1 BUTTON2.1 C1.2 C2.2 C4.2 C5.1 C6.1 C7.1 C8.1 C9.1 C10.1 C11.1 C12.1 C13.2 C14.2 C15.2 C16.2 C17.1 C18.1 C19.2 C20.2 C21.2 C22.2 C23.2 C24.1 C25.1 D2.1 D5.C D6.3 D6.8 J1.8 J2.A1_B12 J2.B1_A12 J2.SH1 J2.SH2 J2.SH3 J2.SH4 P1.1 P2.1 Q2.E R1.2 R2.2 R3.1 R7.1 R8.2 R9.1 R10.1 R11.1 R23.2 R26.2 U2.2 U3.11 U4.9 U4.19 U4.20 U4.21 U4.22 U4.23 U4.24 U4.25 U4.26 U4.27 U4.28 U4.29 U4.30 U4.31 U4.32 U4.33 U4.34 U4.35 U4.36 U4.37 U4.38 U4.39 U5.3 U5.29 U6.1 | length 3.4
  Top Layer w0.381: D6.8 D6.3 ; U5.3 70.887,100.322 v3(71.387,99.822)
  other v2: 30,50 40,50 50,50 60,50 70,50 80,50 90,50 100,50 110,50 120,50 130,50 85,58.961 95,59.342 45,59.454 55,59.454 65,59.454 75,59.454 125,60 135,60 40,70 50,70 120,70 130,70 35,80 45,80 75,80 105,80 115,80 135,80 95,80.358 30,90 40,90 50,90 80,90 90,90 100,90 110,90 130,90 35,100 45,100 75,100 85,100 105,100 125,100 135,100 40,110 70,110 100,110 130,110 35,120 45,120 105,120 115,120 125,120
  other v3: 70.287,98.722 71.387,98.722 72.487,98.722 70.287,99.822 72.487,99.822 70.287,100.922 71.387,100.922 72.487,100.922
NetB1_1: B1.1 U3.16 U4.10 | length 47.1
  Top Layer w0.35: v1(86.487,95.694) 86.605,95.576 U3.16@86.605,86.611 ; v1(100.995,101.697) 101.026,101.727 105.688,101.727 U4.10@111.447,107.486
  Top Layer w0.381: U4.10@111.447,107.486 U4.10 117.685,107.486 B1.1
  Bottom Layer w0.35: v1(86.487,95.694) 92.489,101.697 v1(100.995,101.697)
NetB2_1: B2.1 U3.13 U4.14 | length 49.7
  Top Layer w0.35: U3.13@88.128,86.501 88.128,90.25 111.089,113.211 111.172,113.211 111.364,113.403 U4.14@111.364,113.486
  Top Layer w0.381: U4.14@111.447,113.486 U4.14 112.047,113.486 120.01,121.449 120.01,122.042 B2.1@120.396,122.428
NetB3_1: B3.1 R5.1 R6.2 U3.14 U4.13 | length 96.4
  Top Layer w0.35: R5.1 60.094,74.414 60.094,72.397 R6.2 60.101,72.515 60.276,72.69 60.401,72.69 64.927,77.216 v1(66.294,77.216) ; U3.14 87.613,90.409 87.925,90.721 87.925,91.372 v1(88.101,91.548) ; v1@88.039,91.611 88.249,91.821 88.249,92.694 v1(99.822,104.267) ; v1(103.251,104.013) 103.427,104.189 103.427,104.697 108.633,109.903 109.364,109.903 111.447,111.986 U4.13 112.047,111.986 119.441,119.38 B3.1@128.524,119.38
  Bottom Layer w0.35: v1(66.294,77.216) 73.533,77.216 87.865,91.548 v1(88.101,91.548) ; v1@100.076,104.013 100.203,104.14 103.124,104.14 v1(103.251,104.013)
  Bottom Layer w0.381: v1(99.822,104.267) v1@100.076,104.013
NetB4_1: B4.1 U3.15 U4.4 | length 37.5
  Top Layer w0.35: U3.15 87.136,86.509 87.136,92.943 87.455,93.262 87.455,108.494 U4.4@93.947,114.986
  Top Layer w0.381: B4.1 90.475,114.986 93.947,114.986 U4.4
NetB5_1: B5.1 U3.18 U4.6 | length 37.1
  Top Layer w0.35: v1(84.963,97.663) 84.963,91.026 85.598,90.391 U3.18@85.598,86.595 ; v1(90.551,103.251) 90.551,108.59 U4.6@93.947,111.986
  Top Layer w0.381: U4.6@93.947,111.986 U4.6
  Bottom Layer w0.35: v1(84.963,97.663) v1(90.551,103.251)
  Bottom Layer w0.381: B5.1@78.867,102.235 B5.1@79.388,102.235 ; B5.1@80.023,102.362 84.722,97.663 v1(84.963,97.663)
NetB6_1: B6.1 U3.17 U4.5 | length 34.2
  Top Layer w0.35: B6.1 85.286,104.198 85.286,102.669 85.979,101.976 v1(85.979,101.727) 85.979,96.928 85.534,96.483 85.534,92.031 86.106,91.459 U3.17@86.106,86.493 ; 88.519,108.058 U4.5@93.947,113.486
  Top Layer w0.381: U3.17@86.106,86.493 U3.17 ; v1(88.392,103.886) 88.519,104.013 88.519,108.058 ; U4.5@93.947,113.486 U4.5
  Bottom Layer w0.35: v1(85.979,101.727) 86.106,101.727 88.265,103.886 v1(88.392,103.886)
NetB9_1: B9.1 P2.4 R22.2 U4.12 | length 116.5
  Top Layer w0.381: v1(63.627,106.045) 63.754,105.918 v1(68.199,105.918) ; R22.2 73.404,106.06 74.072,106.728 76.928,106.728 77.102,106.553 v1(77.343,106.553) 81.184,106.553 82.677,105.06 v1(82.677,96.901) ; v1(109.728,108.966) 109.927,108.966 U4.12@111.447,110.486 ; U4.12 125.853,110.486 B9.1
  Bottom Layer w0.381: P2.4 39.37,106.045 v1(63.627,106.045) ; v1(68.199,105.918) 68.199,108.839 68.453,109.093 74.803,109.093 v1(77.343,106.553) ; 83.345,96.647 86.743,96.647 92.902,102.806 93.359,102.806 99.518,108.966 v1(109.728,108.966)
NetB11_1: B11.1 P2.3 R21.2 U4.11 | length 146.1
  Top Layer w0.381: R21.2 71.499,106.06 72.957,107.518 72.957,107.569 85.725,107.569 v1(86.487,106.807) ; v1(94.107,104.902) 98.425,104.902 v1(98.933,105.41) ; v1(105.664,104.394) 105.679,104.409 106.87,104.409 111.447,108.986 U4.11 128.071,108.986 129.234,107.823 B11.1@129.413,107.823 ; B11.1@128.651,107.315 B11.1@129.159,107.823
  Bottom Layer w0.381: P2.3 34.29,103.505 34.29,107.555 52.592,125.857 79.883,125.857 86.487,119.253 v1(86.487,106.807) 92.202,106.807 v1(94.107,104.902) ; v1(98.933,105.41) 104.648,105.41 v1(105.664,104.394)
NetBUTTON1_3: BUTTON1.3 C19.1 Q3.3 R15.1 U4.2 | length 55.9
  Top Layer w0.381: U4.2 94.547,117.986 103.503,109.029 103.503,107.952 v1(103.632,107.823) ; Q3.3 121.412,85.156 121.635,85.379 121.635,85.453 121.795,85.613 R15.1 ; v1(121.539,103.124) 121.539,93.259 119.435,91.155 BUTTON1.3 119.435,90.455 119.945,89.945 120.292,89.945 122.099,88.138 C19.1 R15.1@122.174,85.675
  Bottom Layer w0.381: v1(103.632,107.823) 108.331,103.124 v1(121.539,103.124)
NetBUTTON2_3: BUTTON2.3 Q4.3 U4.8 | length 36.9
  Top Layer w0.381: v1(92.837,99.187) 92.71,99.314 92.71,107.749 93.947,108.986 U4.8 ; v1(105.283,94.869) 106.515,93.637 106.515,91.21 BUTTON2.3 107.025,86.026 107.961,85.09 Q4.3
  Bottom Layer w0.381: v1(92.837,99.187) 98.298,93.726 104.14,93.726 v1(105.283,94.869)
NetC1_1: C1.1 D1.2 J1.2 | length 56.6
  Top Layer w0.35: D1.2 54.006,67.912 C1.1 54.293,68.099 54.99,67.402 54.99,67.374 62.04,60.325 102.382,60.325 103.632,59.075 J1.2@103.632,58.525
NetC2_1: C2.1 D3.1 J1.4 | length 80.8
  Top Layer w0.35: C2.1 40.371,78.486 D3.1 43.32,78.486 43.815,77.991 v1(43.815,69.088) ; v1(104.219,62.611) 104.219,62.537 104.648,62.108 104.648,58.676 104.635,58.663 J1.4@104.635,58.525
  Bottom Layer w0.35: v1(43.815,69.088) 43.959,68.944 43.959,67.928 46.228,65.659 101.346,65.659 104.219,62.786 v1(104.219,62.611)
NetC3_1: C3.1 D3.2 L1.1 Q1.3 | length 25.6
  Top Layer w0.35: D3.2 43.271,81.452 L1.1 ; Q1.3@51.564,87.376 Q1.3 51.014,87.376 50.939,87.301 50.939,87.026 47.184,83.271 L1.1 ; C3.1 52.07,72.644 47.184,77.53 L1.1
NetC3_2: C3.2 D1.1 D2.2 | length 6.2
  Top Layer w0.35: D2.2 D1.1 54.515,70.772 C3.2
NetC4_1: C4.1 C7.2 C13.1 J1.9 J1.10 L1.2 U2.5 | length 80.5
  Top Layer w0.35: L1.2 52.899,79.33 C4.1 ; C7.2 C4.1 ; v1(54.356,81.407) 53.394,80.445 53.394,79.825 C4.1 ; U2.5 70.924,78.156 71.247,78.479 C13.1@71.247,80.443 ; v1(71.501,82.042) 71.374,81.915 71.374,80.645 C13.1 C13.1@71.247,80.443 ; J1.9@107.188,58.166 107.61,58.588 107.61,65.364 105.664,67.31 98.698,74.276 78.405,74.276 72.563,80.118 71.572,80.118 C13.1@71.247,80.443
  Bottom Layer w0.35: v1(54.356,81.407) 59.127,81.407 59.762,82.042 v1(71.501,82.042)
NetC5_2: C5.2 J1.21 | length 10.5
  Top Layer w0.35: J1.21@113.126,58.525 113.126,59.142 116.35,62.366 116.368,62.366 120.042,66.04 C5.2
NetC6_2: C6.2 J1.20 | length 9.5
  Top Layer w0.35: J1.20@112.635,58.525 112.635,58.663 112.649,58.677 112.649,61.441 117.248,66.04 C6.2
NetC8_2: C8.2 J1.7 | length 20.7
  Top Layer w0.35: C8.2 103.544,67.184 106.299,64.429 106.299,60.071 106.158,59.93 106.158,58.686 106.135,58.663 J1.7@106.135,58.525
NetC9_2: C9.2 J1.6 | length 22.6
  Top Layer w0.35: C9.2 90.27,67.311 92.557,65.024 105.029,65.024 105.537,64.516 105.537,64.224 105.633,64.128 J1.6@105.633,58.525 ; J1.6@105.562,58.097 J1.6@105.585,58.097
NetC10_2: C10.2 J1.5 | length 24.7
  Top Layer w0.35: C10.2 87.349,67.311 90.525,64.135 104.951,64.135 105.156,63.93 105.156,58.684 105.135,58.663 J1.5@105.135,58.525
NetC11_2: C11.2 J1.3 | length 23.9
  Top Layer w0.35: C11.2 84.936,67.312 88.845,63.403 100.935,63.403 102.682,61.656 102.682,61.494 104.14,60.037 104.14,58.668 104.135,58.663 J1.3@104.135,58.525
NetC12_2: C12.2 J1.1 | length 26
  Top Layer w0.35: C12.2 82.55,64.389 v1(85.344,61.595) ; v1(99.822,58.293) 103.103,58.293 J1.1
  Bottom Layer w0.35: v1(85.344,61.595) 88.646,58.293 v1(99.822,58.293)
NetC15_1: C15.1 U2.4 | length 2.6
  Top Layer w0.35: U2.4 70.712,76.238 73.241,76.238 C15.1
NetC23_1: C23.1 R25.1 R26.1 U5.8 | length 8.1
  Top Layer w0.35: R25.1 68.197,92.232 68.372,92.407 68.372,92.502 68.756,92.886 68.756,95.325 69.081,95.65 69.115,95.65 69.887,96.422 U5.8
NetC24_2: C24.2 R28.2 U6.3 | length 6.6
  Top Layer w0.381: R28.2@72.478,113.196 R28.2@72.517,113.157 ; 75.068,115.875 75.268,115.875 75.678,116.284 U6.3
  Top Layer w0.8: C24.2 72.185,115.518 72.285,115.618 72.497,115.618 72.754,115.875 75.068,115.875 ; R28.2@72.478,113.196 C24.2@72.478,115.658
NetC25_2: C25.2 R27.1 U6.2 U6.4 | length 12.5
  Top Layer w0.8: R27.1 74.853,119.569 77.499,119.569 77.549,119.619 C25.2 77.851,119.317 77.851,116.611 U6.2 U6.4
NetD5_A: D5.A R14.1 | length 3.2
  Top Layer w0.8: D5.A R14.1
NetJ1_11: J1.11 U3.3 | length 41.8
  Top Layer w0.35: U3.3 85.613,78.09 87.361,76.342 100.315,76.342 108.093,68.564 J1.11@108.093,58.325
NetJ1_12: J1.12 U3.4 | length 41.4
  Top Layer w0.35: U3.4 86.113,81.287 86.106,81.28 86.106,78.994 87.122,77.978 99.949,77.978 108.585,69.342 J1.12@108.585,58.638
NetJ1_13: J1.13 U3.5 | length 41.5
  Top Layer w0.35: U3.5 86.613,79.503 87.459,78.657 100.374,78.657 109.093,69.938 J1.13@109.093,58.525
NetJ1_14: J1.14 U3.6 | length 41.2
  Top Layer w0.35: U3.6 87.113,80.908 88.265,79.756 100.584,79.756 109.601,70.739 J1.14@109.601,58.525
NetJ1_16: J1.16 U3.8 | length 41.1
  Top Layer w0.35: U3.8 88.138,83.161 88.138,82.842 88.811,82.169 100.965,82.169 110.617,72.517 J1.16@110.617,58.525
NetJ1_17: J1.17 R3.2 | length 8.7
  Top Layer w0.35: J1.17@111.094,58.54 111.094,62.578 114.302,65.786 R3.2
NetJ1_22: J1.22 Q1.2 R2.1 | length 88.4
  Top Layer w0.35: Q1.2 53.664,88.026 53.77,87.92 R2.1 56.104,87.838 58.339,87.838 59.944,86.233 v1(59.944,80.899) ; 113.603,58.801 113.603,58.945 115.665,61.007 115.684,61.007 116.691,62.014 118.783,62.014 v1(120.015,63.246)
  Bottom Layer w0.35: v1(59.944,80.899) 70.993,69.85 113.538,69.85 120.015,63.373 v1(120.015,63.246)
NetJ1_23: J1.23 Q1.1 R1.1 | length 86
  Top Layer w0.35: Q1.1 53.339,86.726 53.264,86.651 R1.1 53.264,83.595 53.564,83.295 53.793,83.295 56.515,80.573 56.515,71.628 65.532,62.611 v1(65.659,62.611) ; J1.23@114.158,58.552 114.158,58.825 115.863,60.53 116.791,60.53 v1(116.967,60.706)
  Bottom Layer w0.35: v1(65.659,62.611) 90.851,62.611 93.391,60.071 104.737,60.071 105.372,60.706 v1(116.967,60.706)
NetJ2_A5: J2.A5 R10.2 | length 3
  Top Layer w0.35: 61.099,118.86 62.18,117.779 62.18,117.284 62.355,117.109 R10.2
  Top Layer w0.381: J2.A5 61.099,119.546 61.099,118.86
NetJ2_B5: J2.B5 R11.2 | length 2.3
  Top Layer w0.381: R11.2@58.069,116.919 J2.B5@58.069,119.212
NetP1_2: P1.2 R16.1 U5.5 | length 75.1
  Top Layer w0.35: R16.1@60.244,109.794 60.244,106.738 66.901,100.08 v1(66.901,100.048) 67.603,99.347 68.962,99.347 U5.5
  Bottom Layer w0.35: P1.2 34.495,65.024 34.29,65.229 34.29,82.931 42.545,91.186 58.928,91.186 66.725,98.983 66.725,99.872 v1(66.901,100.048)
NetP1_3: P1.3 R13.1 U5.4 | length 75
  Top Layer w0.35: P1.3 33.733,67.564 33.528,67.769 33.528,79.629 46.022,92.123 v1(46.228,92.123) ; R13.1 62.69,112.713 62.69,105.585 64.933,103.342 v1(65.115,103.342) ; v1@65.024,103.251 68.428,99.847 U5.4@68.687,99.847
  Bottom Layer w0.35: v1(46.228,92.123) 59.19,92.123 63.119,96.052 63.119,101.346 v1(65.115,103.342)
NetP2_2: P2.2 Q3.2 R17.1 R30.2 | length 103.7
  Top Layer w0.35: v1(55.118,93.599) 55.236,93.717 67.446,93.717 v1(67.564,93.835) ; R30.2 75.436,106.06 76.708,104.788 76.708,102.235 80.137,98.806 v1(80.137,93.726) ; v1(99.568,85.979) 99.568,85.937 101.169,84.336 R17.1@101.219,84.336 ; R17.1@101.151,84.269 102.283,83.137
  Top Layer w0.381: 102.283,83.137 103.251,82.169 116.332,82.169 117.475,83.312 117.475,83.896 117.785,84.206 Q3.2
  Bottom Layer w0.35: P2.2 50.419,98.425 55.118,93.726 v1(55.118,93.599) ; v1(67.564,93.835) 67.618,93.78 80.083,93.78 v1(80.137,93.726)
  Bottom Layer w0.381: v1(80.137,93.726) 91.821,93.726 v1(99.568,85.979)
NetP2_5: P2.5 Q4.2 R12.1 R29.2 | length 93.8
  Top Layer w0.381: v1(63.627,108.204) 63.675,108.156 69.644,108.156 v1(69.691,108.109) 69.58,107.998 69.58,106.171 R29.2 ; v1(103.632,83.693) 103.802,83.863 105.684,83.863 Q4.2 114.824,84.14 115.449,84.765 R12.1@115.895,84.765
  Bottom Layer w0.381: P2.5 38.989,108.204 v1(63.627,108.204) ; v1(69.691,108.109) 75.727,102.073 75.727,101.184 82.169,94.742 93.599,94.742 102.718,85.623 102.718,84.607 v1(103.632,83.693)
NetQ2_B: Q2.B R5.2 R7.2 | length 4.3
  Top Layer w0.35: R5.2 58.857,74.493 58.857,76.637 R7.2 60.691,76.708 Q2.B
NetQ2_C: Q2.C R4.1 U1.1 | length 15.9
  Top Layer w0.35: Q2.C 61.768,86.279 64.262,88.773 65.418,88.773 66.436,87.755 R4.1 R4.1@66.436,87.505
  Top Layer w0.8: R4.1@66.436,87.505 66.99,86.951 U1.1
NetQ3_1: Q3.1 R12.2 | length 2.4
  Top Layer w0.35: R12.2@115.57,85.836 R12.2@115.62,85.886 ; Q3.1@117.636,85.886 Q3.1
  Top Layer w0.381: R12.2@115.62,85.886 Q3.1@117.636,85.886
NetQ4_1: Q4.1 R17.2 | length 5
  Top Layer w0.381: R17.2@101.304,85.344 105.228,85.344 105.451,85.567 105.451,85.73 105.761,86.04 Q4.1
NetR4_2: R4.2 U1.2 | length 2.2
  Top Layer w0.35: U1.2 U1.2@65.113,85.435 ; R4.2@65.113,87.607 R4.2
  Top Layer w0.8: U1.2@65.113,85.435 R4.2@65.113,87.607
NetR6_1: R6.1 R8.1 R9.2 U2.3 | length 14.1
  Top Layer w0.35: R6.1 58.801,72.265 59.946,71.12 63.375,71.12 64.264,72.009 R8.1 64.396,72.002 66.792,72.002 66.96,72.169 67.216,72.169 67.617,72.57 67.864,72.817 67.864,76.116 68.024,76.276 U2.3
NetR21_1: R21.1 U5.26 | length 2.8
  Top Layer w0.35: U5.26 70.887,103.923 71.074,104.11 71.074,104.585 71.249,104.76 R21.1
NetR22_1: R22.1 U5.25 | length 3.8
  Top Layer w0.35: U5.25 71.387,103.664 71.592,103.869 72.263,103.869 73.154,104.76 R22.1
NetR23_1: R23.1 U5.11 | length 3.2
  Top Layer w0.35: U5.11 71.387,95.455 71.592,95.25 72.375,95.25 R23.1
NetR24_1: R24.1 U5.9 | length 2
  Top Layer w0.35: U5.9 70.387,95.681 R24.1@70.564,95.504
NetR29_1: R29.1 U5.28 | length 2.8
  Top Layer w0.35: R29.1 69.594,104.76 69.769,104.585 69.769,104.46 69.887,104.342 U5.28
NetR30_1: R30.1 U5.24 | length 4.8
  Top Layer w0.35: U5.24 71.912,102.247 71.912,102.718 72.877,103.683 74.109,103.683 75.186,104.76 R30.1
RST: J1.15 U3.7 | length 41.3
  Top Layer w0.35: U3.7 87.613,81.982 88.166,81.43 100.688,81.43 110.109,72.009 J1.15@110.109,58.525
USB_5V: B13.1 C18.2 D4.C R28.1 | length 30.3
  Top Layer w0.8: C18.2 54.609,97.817 56.743,95.683 57.86,95.683 B13.1 ; D4.C@54.609,100.61 55.334,101.335 D4.C 58.685,101.335 v1(60.452,99.568) ; v1(65.405,109.855) 65.455,109.905 67.64,109.905 70.413,112.678 R28.1
  Bottom Layer w0.8: v1(60.452,99.568) 60.452,100.711 65.405,105.664 v1(65.405,109.855)
USB_D+: D6.1 D6.10 J2.A6 J2.B6 R13.2 | length 12.6
  Top Layer w0.35: J2.B6 59.067,120.522 59.543,120.998 59.833,120.998 60.069,120.762 60.069,119.58 J2.A6 ; J2.A6@60.069,119.212 60.069,118.29 59.642,117.863 59.642,117.087 60.325,116.404 D6.1 D6.10 61.778,113.226 62.613,114.061 R13.2
USB_D-: D6.2 D6.9 J2.A7 J2.B7 R16.2 | length 12.3
  Top Layer w0.35: v1@59.165,115.992 59.165,118.061 59.544,118.44 59.544,118.812 59.569,118.837 J2.A7@59.569,119.212 ; v1@59.204,115.952 59.827,115.33 D6.2@59.827,114.169 ; D6.2@59.827,114.059 59.827,113.226 59.827,112.903 59.944,112.786 R16.2 ; J2.B7 60.573,119.572 60.573,117.481 v1(60.579,117.475)
  Bottom Layer w0.35: v1(59.203,115.951) 59.203,116.099 v1(60.579,117.475)
VBUS: P1.5 R18.1 R25.2 | length 55.9
  Top Layer w0.8: P1.5 36.449,79.121 50.673,93.345 ; R18.1 50.038,93.98 50.673,93.345 ; R25.2 53.086,90.932 50.673,93.345
VBUS_USB: D4.A D6.4 D6.7 J2.A4_B9 J2.B4_A9 R18.2 | length 7.3
  Top Layer w0.318: J2.B4_A9 57.558,119.719 57.558,120.198 59.265,121.905 60.369,121.905 62.076,120.198 62.076,119.719 J2.A4_B9
VCC: C14.1 C16.1 U1.3 U2.1 U3.19
VDD_3V3: B10.1 C20.1 C21.1 C22.1 P1.4 P2.6 R14.2 R15.2 R24.2 R27.2 U4.1 U5.6 U5.7 | length 212.8
  Top Layer w0.8: P1.4 36.576,70.104 v1(40.894,74.422) ; v1(64.389,100.838) 64.479,100.748 64.664,100.748 65.621,99.791 65.621,99.046 66.194,98.473 66.194,98.398 C22.1 66.294,98.223 66.394,98.123 66.436,98.123 66.436,97.394 65.532,96.49 v1(65.532,96.441) ; 72.771,92.583 v1(72.771,90.297) 78.351,90.297 80.764,92.71 v1(83.185,92.71) ; R27.2 74.828,120.919 v1@76.205,122.296 ; v1@76.464,122.555 85.09,122.555 89.251,118.394 R14.2 ; v1(121.666,81.534) 121.666,81.661 121.92,81.915 121.92,83.82 ; v1@121.793,81.661 B10.1@124.079,79.375
  Bottom Layer w0.8: P2.6 50.546,122.301 v1(76.2,122.301) 66.802,112.903 66.802,103.124 64.516,100.838 v1(64.389,100.838) ; v1(40.894,74.422) 56.007,89.535 72.009,89.535 v1(72.771,90.297) ; v1(65.532,96.441) 65.532,94.107 66.966,92.673 70.395,92.673 v1(70.485,92.583) ; v1(83.185,92.71) 85.885,92.71 88.885,92.71 104.394,77.201 116.444,77.201 120.777,81.534 v1(121.666,81.534) ; B10.1@123.698,79.502 B10.1
pads on no net: BUTTON1.2 BUTTON1.4 BUTTON2.2 BUTTON2.4 D6.5 D6.6 FID1. FID2. FID3. FID4. J1.18 J1.19 J1.24 J1.S1 J1.S2 J2. J2.A8 J2.B8 U3.1 U3.9 U3.12 U3.20 U3.21 U3.22 U3.23 U3.24 U3.25 U4.3 U4.7 U4.15 U4.16 U4.17 U4.18 U5.1 U5.2 U5.10 U5.12 U5.13 U5.14 U5.15 U5.16 U5.17 U5.18 U5.19 U5.20 U5.21 U5.22 U5.23 U5.27

## Polygon pours and split planes (outlines as drawn)
GND on Top Layer "GND_L01_P002" (solid, pour order 2): 25.4,44.069 25.4,61.087 25.4,61.214 31.496,61.214 ccw(c31.496,62.103) 32.385,62.103 32.385,70.294 ccw(c31.369,70.294) 31.369,71.31 25.4,71.31 25.4,127 93.218,127 93.218,120.65 112.776,120.65 112.776,127 133.118,126.981 cw(c133.218,120.898) 139.302,120.998 139.302,120.997 139.319,49.706 cw(c133.33,50.058) 132.977,44.069
GND on Bottom Layer "GND_L02_P003" (solid, pour order 3): 25.4,44.069 25.4,61.087 25.4,61.214 31.496,61.214 ccw(c31.496,62.103) 32.385,62.103 32.385,70.294 ccw(c31.369,70.294) 31.369,71.31 25.4,71.31 25.4,127 93.218,127 93.218,120.65 112.776,120.65 112.776,127 133.118,126.981 cw(c133.218,120.898) 139.302,120.998 139.302,120.997 139.319,49.706 cw(c133.33,50.058) 132.977,44.069

## Other copper
Top Layer:
  region net VCC: 83.947,86.042 83.947,87.63 72.644,87.63 72.644,83.82 65.532,83.82 65.532,82.931 65.722,82.931 75.311,82.931 75.311,86.042
  region net VBUS_USB: 49.403,106.934 50.927,106.934 50.927,107.315 57.023,107.315 57.023,111.252 58.928,111.252 58.928,114.427 58.609,114.427 58.609,112.522 49.403,112.522
  region net VBUS_USB: 57.658,119.761 57.658,117.475 57.15,117.475 57.15,112.268 56.261,112.268 56.515,112.522 56.515,118.11 57.193,118.111 57.193,119.761
  region net VDD_3V3: 94.996,120.015 94.996,118.999 91.186,118.999 91.186,118.11 88.773,118.11 88.773,119.888
  region net VDD_3V3: 69.977,93.965 69.977,91.694 77.724,91.694 77.724,93.091 70.866,93.091 70.866,93.965
  region net 3V3: 85.217,83.439 82.677,83.439 82.677,84.328 80.899,84.328 80.899,82.296 85.217,82.296
  region net VCC: 68.834,77.851 67.183,77.851 67.183,79.248 66.04,79.248 66.04,81.661 65.532,81.661 65.532,83.82 66.548,83.82 66.548,82.042 67.818,82.042 67.818,80.137 67.691,80.01 67.818,79.883 67.818,79.248 68.834,79.248
  region net VCC: 82.55,90.17 82.55,88.011 85.217,88.011 85.217,86.106 83.566,86.106 83.566,87.503 80.772,87.503 80.772,90.17
  region net VDD_3V3: 69.342,98.933 65.786,98.933 65.786,98.806 65.786,97.663 69.342,97.663
  region net USB_5V: 53.975,102.616 53.975,101.981 53.975,96.774 61.298,96.774 61.298,102.616

## Silkscreen, mask and mechanical layers (free items; w line width, h text height)
Top Overlay:
  drawing of 6 lines, arcs and shapes, not listed
  text "3V3" at 38.608,108.077 h1
  text "DTR" at 38.608,105.664 h1
  text "TX" at 38.735,102.87 h1
  text "RX" at 38.735,100.33 h1
  text "RTS" at 38.608,98.044 h1
  text "GND" at 38.608,95.123 h1
  text "5V" at 38.354,71.882 h1
  text "3V" at 38.354,69.85 h1
  text "USB D+" at 38.1,67.183 h1
  text "USB D-" at 38.1,64.643 h1
  text "GND" at 38.354,61.722 h1
  text "© C3 Labs Private Limited" at 58.42,52.451 h3
  text "4.2\" Driver Board" at 58.293,50.038 h3
  text "Model -" at 58.547,47.752 h3
  text "Version 1.0" at 58.42,45.344 h3
Mechanical 1:
  lines w0.254: 25.4,61.087 25.4,44.069 130.81,44.069 132.977,44.069 ccw(c133.33,50.058) 139.319,49.706 139.302,120.997 139.302,120.998 ccw(c133.218,120.898) 133.118,126.981 112.776,127 112.776,120.65 93.218,120.65 93.218,127 58.674,127
Mechanical 13:
  lines w0.254: 25.4,61.214 31.496,61.214 ccw(c31.496,62.103) 32.385,62.103 32.385,62.547 32.385,70.04 32.385,70.294 ccw(c31.369,70.294) 31.369,71.31 27.305,71.31 25.4,71.31 25.4,109.982 25.4,127 33.528,127 58.674,127

## Text inside footprints (layer, text, board x,y; h text height)
J2: Mechanical 13 "PCB EDGE" at 54.417,126.833 h0.41 r180